# Altium PCB Placa_Alimentacion_9V.PcbDoc
Units mm, origin at the board's own origin, x right, y up, seen from the top; angles counter-clockwise.
Board outline 70 x 70 mm, 2 copper layers (Top Layer, Bottom Layer), stack 1.571 mm thick; 9 components, 3 nets, 48 pads, 0 vias.
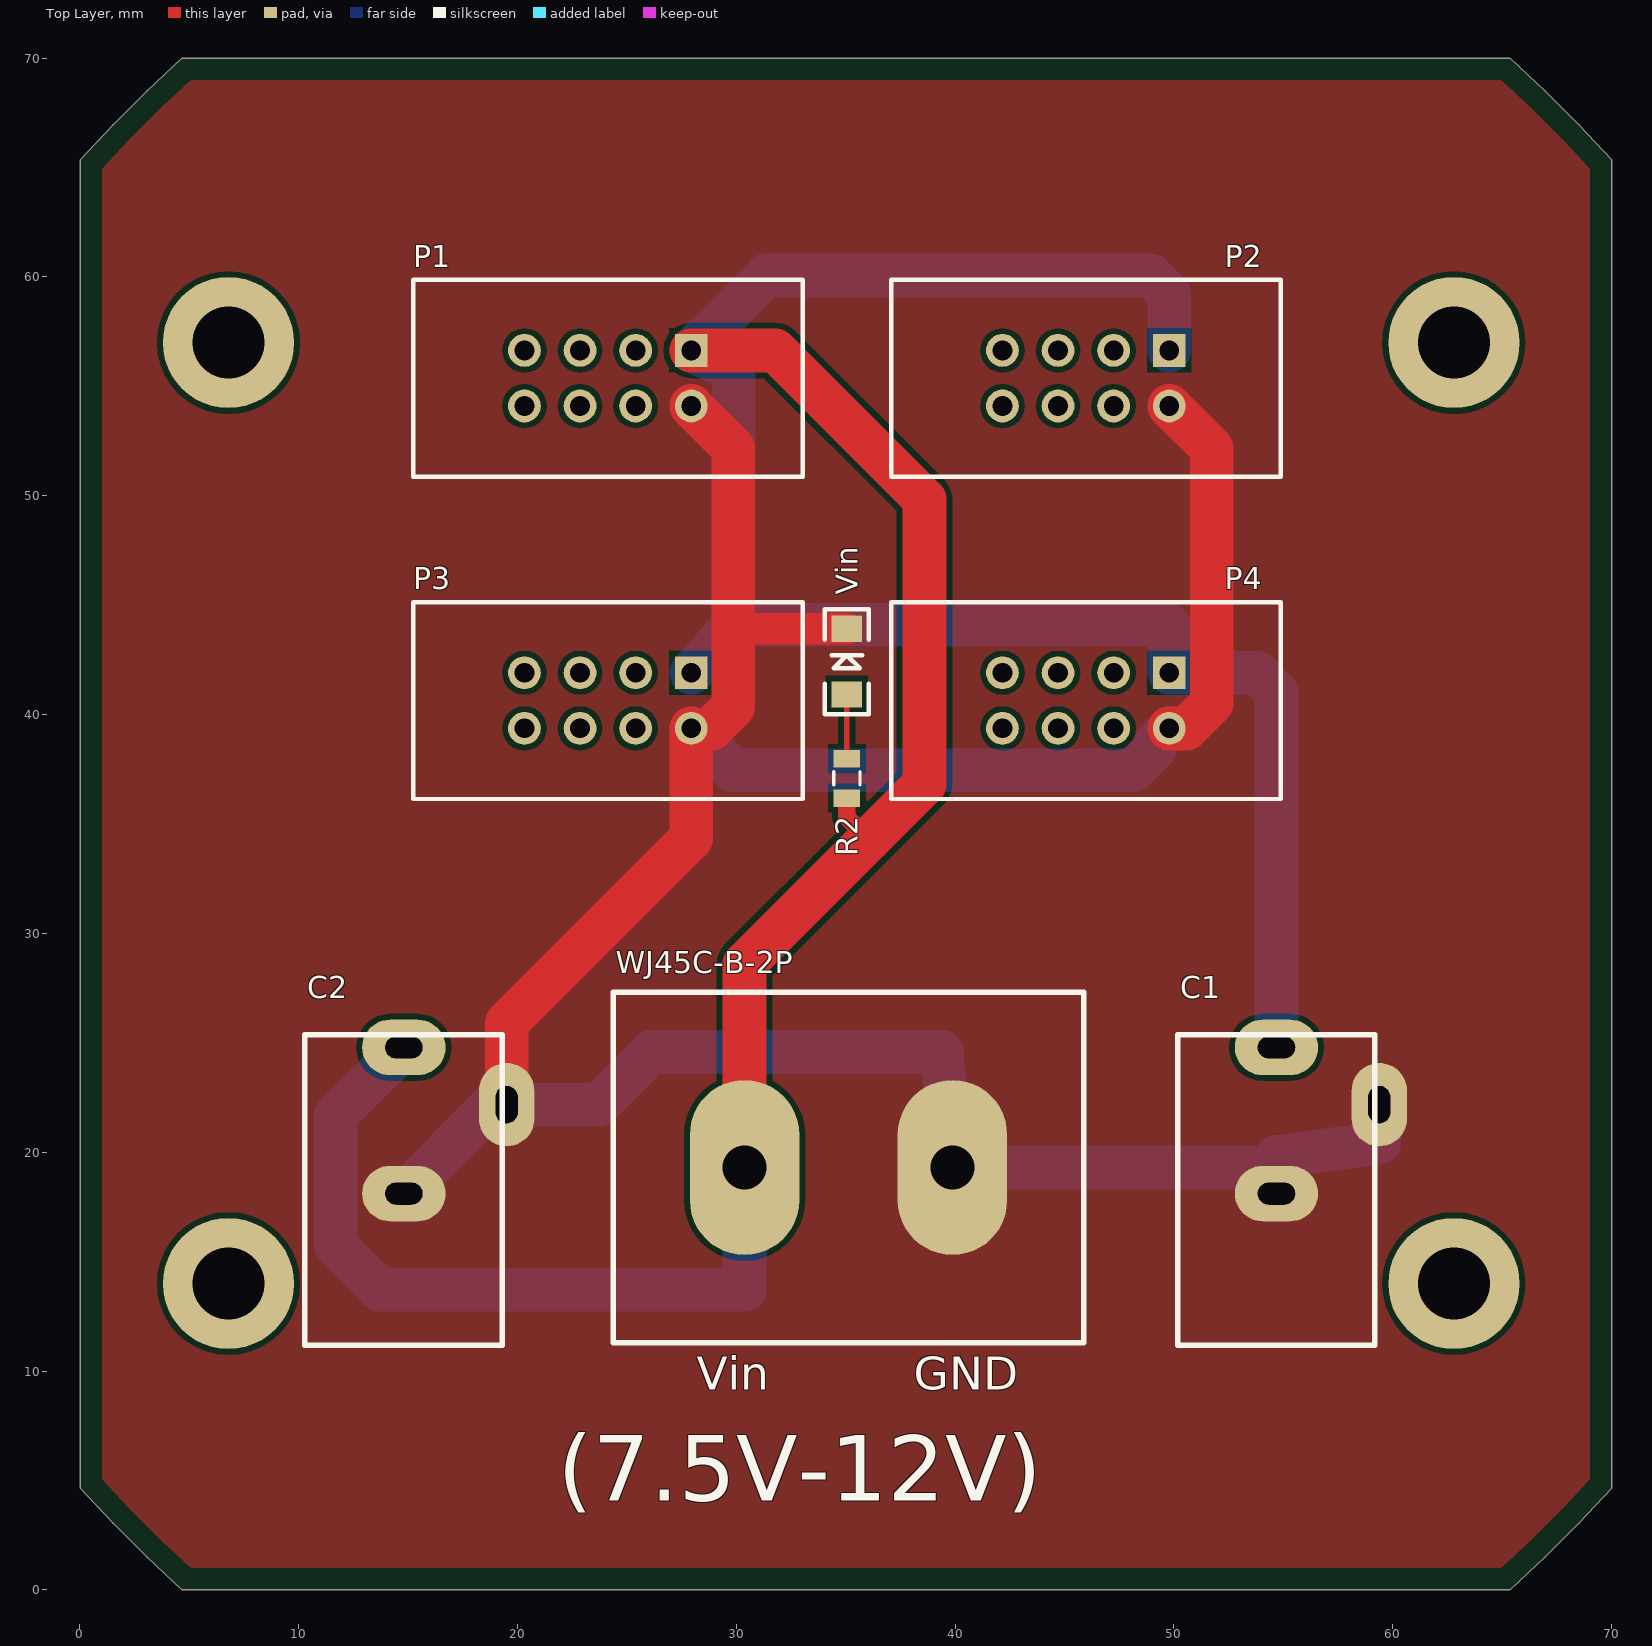
[diagram p0: Top Layer view]
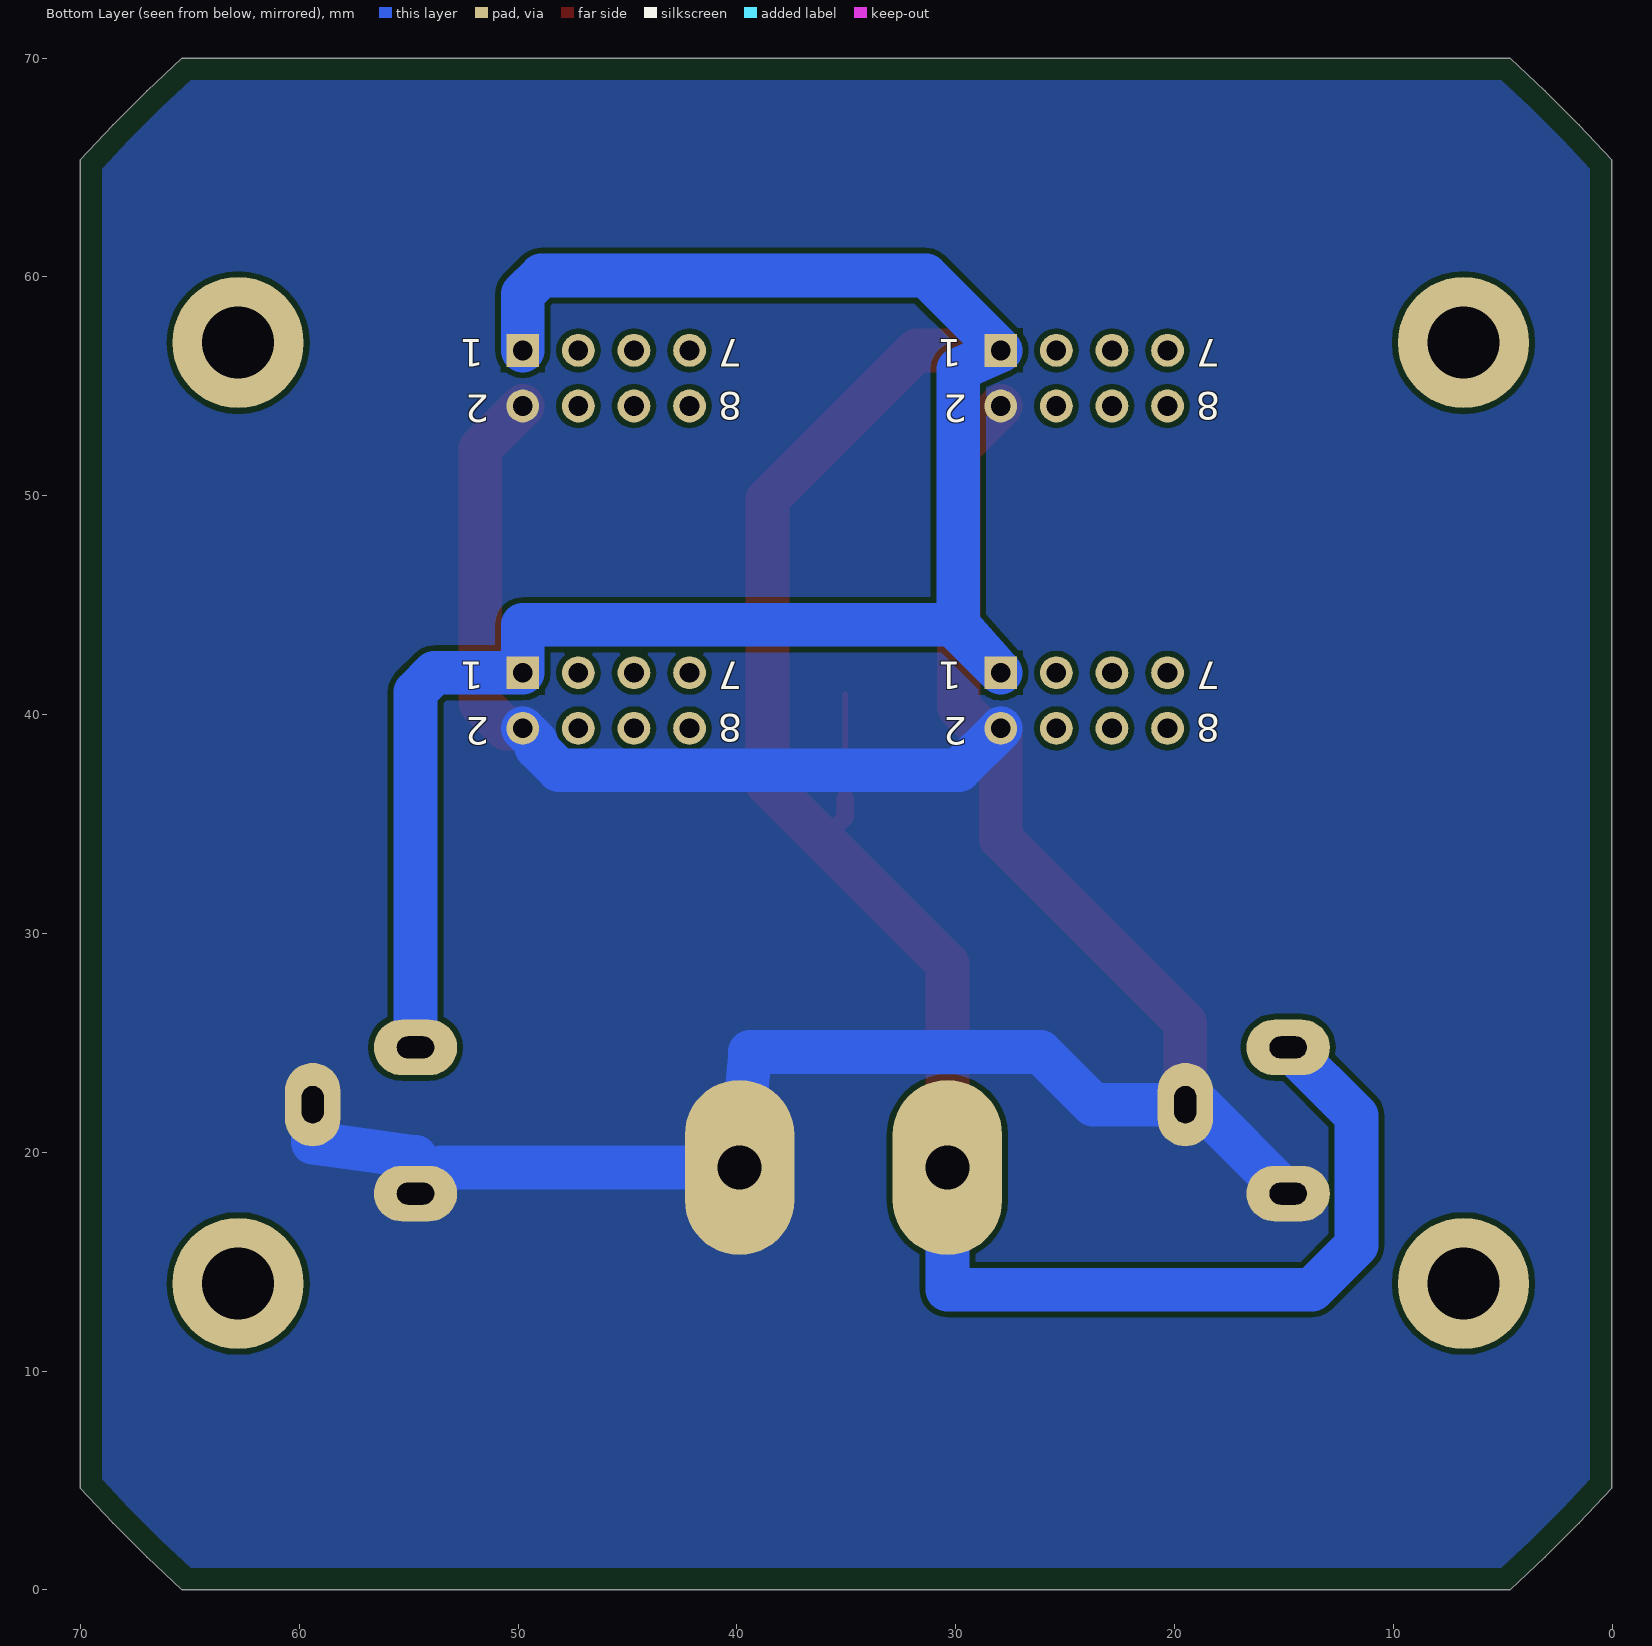
[diagram p1: Bottom Layer view, seen from below]
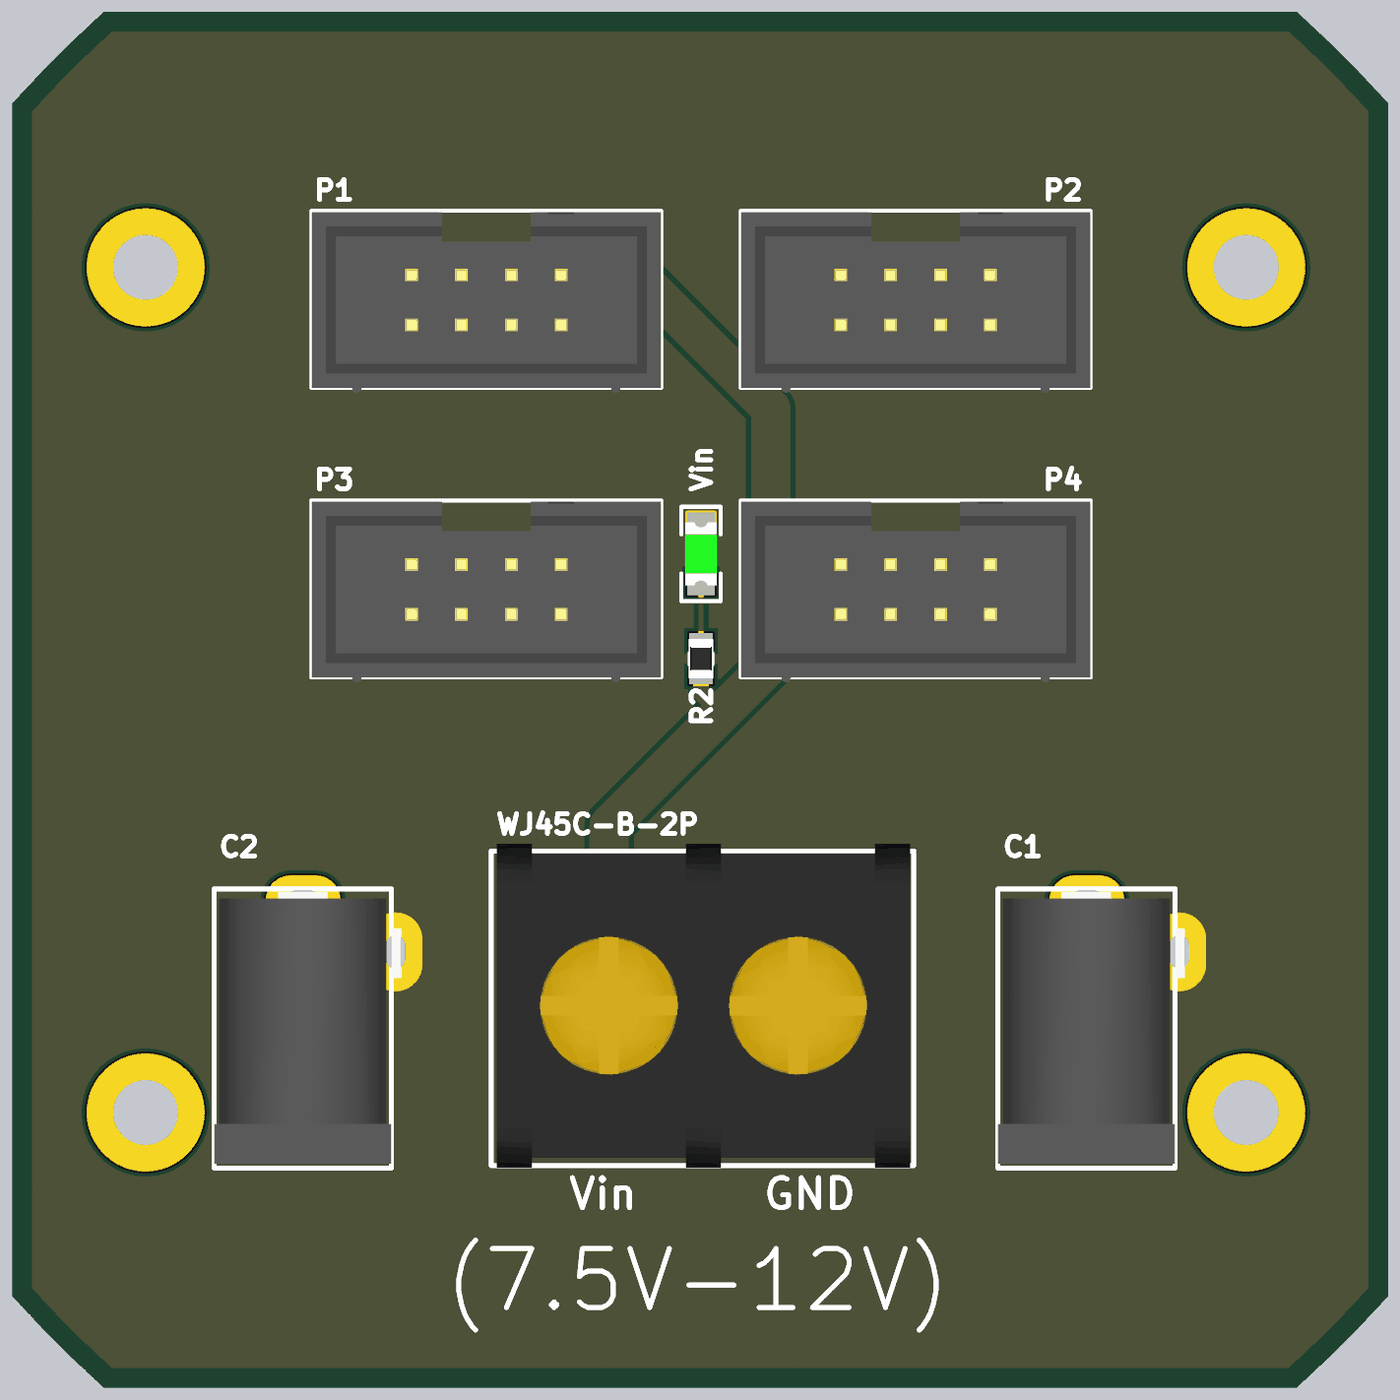
[diagram p2: 3D render of the assembled board from above, using the file's embedded part models]

## Layer stack, top to bottom
Top Solder: solder mask 0.0102, Solder Resist, Dk 3.5
Top Layer: signal copper 0.0356
Dielectric 1: dielectric 1.5, FR-4, Dk 4.8
Bottom Layer: signal copper 0.0356
Bottom Solder: solder mask 0.0102, Solder Resist, Dk 3.5

## Board outline
0.014,4.653 1.515,3.052 3.066,1.501 4.667,0 65.361,0 66.962,1.501 68.513,3.052 70.014,4.653 70.014,65.347 68.513,66.948 66.962,68.499 65.361,70 4.667,70 3.066,68.499 1.515,66.948 0.014,65.347

## Design rules (kind name [scope] priority, off if disabled: settings)
BoardOutlineClearance [All] p1: gap=1 ignorepadtopadclearanceinfootprint=FALSE
Clearance Clearance_2 [InNamedPolygon('GND TOP PLANE')] p1: gap=0.254 ignorepadtopadclearanceinfootprint=FALSE
Clearance Clearance_1 [InNamedPolygon('GND BOTTOM PLANE')] p2: gap=0.254 ignorepadtopadclearanceinfootprint=FALSE
Clearance Clearance_JUMPER [InNet('GND') vs InNet('PGND')] p3: gap=0.05 ignorepadtopadclearanceinfootprint=FALSE
Clearance Clearance_POWER [InNet('24V') vs InNet('PGND')] p4: gap=0.381 ignorepadtopadclearanceinfootprint=FALSE
Clearance [All] p5: gap=0.152 ignorepadtopadclearanceinfootprint=FALSE
HoleSize [All] p1: absolutevalues=TRUE maxlimit=6.3 minlimit=0.3 maxpercent=80.000 minpercent=20.000
PlaneClearance [All] p1: clearance=5.016
PlaneConnect [All] p1: planeconnectstyle=Relief reliefexpansion=0.508 reliefentries=4 reliefconductorwidth=1 reliefairgap=-0.05
PolygonConnect [All] p1: connectstyle=Relief reliefconductorwidth=1 reliefentries=4 polygonreliefangle="90 Angle" airgapwidth=-0.05
RoutingVias RoutingVias_24V [InNet('24V')] p1: holewidth=0.5 width=0.8 viastyle="Through Hole" minholewidth=0.3 minwidth=0.6 maxholewidth=1 maxwidth=1.2
RoutingVias RoutingVias_PGND [InNet('PGND')] p2: holewidth=0.5 width=0.8 viastyle="Through Hole" minholewidth=0.3 minwidth=0.6 maxholewidth=1 maxwidth=1.2
RoutingVias RoutingVias_PGNDC [InNet('PGNDC')] p3: holewidth=0.5 width=0.8 viastyle="Through Hole" minholewidth=0.3 minwidth=0.6 maxholewidth=1 maxwidth=1.2
RoutingVias RoutingVias_MOTOR1 [InNet('MOTOR1')] p4: holewidth=0.5 width=0.8 viastyle="Through Hole" minholewidth=0.3 minwidth=0.6 maxholewidth=1 maxwidth=1.2
RoutingVias RoutingVias_MOTOR2 [InNet('MOTOR2')] p5: holewidth=0.5 width=0.8 viastyle="Through Hole" minholewidth=0.3 minwidth=0.6 maxholewidth=1 maxwidth=1.2
RoutingVias RoutingVias_C17_1 [InNet('NetC17_+')] p6: holewidth=0.5 width=0.8 viastyle="Through Hole" minholewidth=0.3 minwidth=0.6 maxholewidth=1 maxwidth=1.2
RoutingVias [All] p7: holewidth=0.3 width=0.6 viastyle="Through Hole" minholewidth=0.3 minwidth=0.6 maxholewidth=1 maxwidth=1.2
SMDNeckDown [All] p1: percent=120.000
SilkToSilkClearance [All] p1 off: silktosilkclearance=0.127
SolderMaskExpansion [All] p1: expansion=0.102
Width Width_Motor1 [InNet('MOTOR1')] p1: maxlimit=0.889 minlimit=0.7 preferedwidth=0.8
Width Width_Motor2 [InNet('MOTOR2')] p2: maxlimit=0.889 minlimit=0.7 preferedwidth=0.8
Width Width_24V [InNet('24V')] p3: maxlimit=10 minlimit=0.5 preferedwidth=0.8
Width Width_PGND [InNet('PGND')] p4: maxlimit=10 minlimit=0.6 preferedwidth=0.8
Width Width_PGNDC [InNet('PGNDC')] p5: maxlimit=10 minlimit=0.6 preferedwidth=0.8
Width Width_GND [InNet('GND')] p6: maxlimit=10 minlimit=1 preferedwidth=2 checkconnectedcopper=TRUE
Width Width_Vin [InNet('Vin')] p7: maxlimit=5 minlimit=1 preferedwidth=2 checkconnectedcopper=TRUE
Width Width_C17_1 [InNet('NetC17_+')] p8: maxlimit=0.508 minlimit=0.254 preferedwidth=0.381 checkconnectedcopper=TRUE
Width Width_5V [InNet('5V')] p9: maxlimit=0.381 minlimit=0.254 preferedwidth=0.381 checkconnectedcopper=TRUE
Width [All] p10: maxlimit=10 minlimit=0.254 preferedwidth=0.254
26 further rules are at their usual default settings.

## Components (designator, comment, footprint, x,y, rotation, side; value= is the part's Value field where it differs from the comment)
C1 "DC-005C-A" DC-005C-A 59.182,11.176 r90 top
C2 "DC-005C-A" DC-005C-A 19.304,11.176 r90 top
P1 "IDC2X4" IDC2X4 24.13,55.372 r180 top
P2 "IDC2X4" IDC2X4 45.974,55.372 r180 top
P3 "IDC2X4" IDC2X4 24.13,40.64 r180 top
P4 "IDC2X4" IDC2X4 45.974,40.64 r180 top
R2 "1K" 0805 35.052,37.084 r270 top
Vin "1206 LED" LED-1206 35.052,42.418 r90 top
WJ45C-B-2P "WJ45C-B-2P" WJ45C-B-2P 39.878,19.304 r180 top

## Footprints (in the part's own frame and the unit in brackets; to place one, negate y for a bottom-side part, rotate by r counter-clockwise, add the part's x,y. Pads: shape width x height; smd on the part's side, far side on the other; paste and mask are expansions set on the pad)
0805 [mil]
  rect 31.5x47.24 smd: 1(-35.43,0) 2(35.43,0)
  silkscreen extent -12,-24 12,24, body extent -39,-25 39,25, height 20
DC-005C-A [mil] "DC-005C-A C84007"
  oval 100x150 hole 39.37 slot 66.93 at 90 deg: 1(536,177) 2(273,177)
  oval 150x100 hole 39.37 slot 66.93 at 0 deg: 3(433,-8)
  silkscreen extent 0,0 559,355, body extent 9,-19 553,355, height 433
IDC2X4 [mm] "IDC Connector 2x4"
  rect 1.5x1.5 hole 0.9: 1(-3.81,-1.27)
  round 1.5 hole 0.9: 2(-3.81,1.27) 3(-1.27,-1.27) 4(-1.27,1.27) 5(1.27,-1.27) 6(1.27,1.27) 7(3.81,-1.27) 8(3.81,1.27)
  silkscreen extent -8.9,-4.5 8.9,4.5, body extent -8.89,-4.45 8.89,4.76, height 9.01
LED-1206 [mm]
  rect 1.2x1.4 smd: A(-1.5,0) C(1.5,0)
  silkscreen extent -2.4,-1 2.4,1, body extent -1.6,-0.8 1.6,0.8, height 1.11
WJ45C-B-2P [mm]
  oval 5x8 hole 2: 1(0,0) 2(9.5,0)
  silkscreen extent -6,-8 15.5,8, body extent -5.83,-8.38 15.22,8.12, height 18.5

## Part data
P1 P2 P3 P4: "Header, 4-Pin, Dual row", LatestRevisionDate=17-Jul-2002, LatestRevisionNote="Re-released for DXP Platform.", Publisher="Altium Limited"
R2: library part RESISTOR0805-RES
Vin: library part LED1206

## Free pads (board coordinates)
  round 6 hole 3.3: 7(6.794,14) 9(6.794,57) 10(62.794,14) 10(62.794,57)

## Nets (pads, with @x,y where several pads share a name; then routed paths per layer and width w, separated by ;. In a path a pad name is that pad's centre, name@x,y a point inside that pad or via, vN(x,y) a via of type N, cw(c..) or ccw(c..) an arc to the next point about the centre after c; other vN are vias at no path point)
GND: C1.2 C1.3 C2.2 C2.3 P1.2 P2.2 P3.2 P4.2 Vin.C WJ45C-B-2P.1 | length 139.1
  Top Layer w1.44: P3.2 28.876,39.37 ; 29.861,43.918 Vin.C
  Top Layer w2: C2.3 19.507,25.902 27.94,34.335 P3.2 ; P1.2 29.861,52.181 29.861,43.918 29.861,40.355 28.876,39.37 ; P4.2 50.568,39.37 51.73,40.533 51.73,52.156 P2.2
  Bottom Layer w2: C2.2 18.872,22.174 C2.3 23.72,22.174 26.127,24.581 39.395,24.581 WJ45C-B-2P.1 53.492,19.304 C1.2 54.686,19.781 59.385,20.441 C1.3 ; P3.2 29.851,37.459 48.124,37.459 49.165,38.501 49.165,38.751 P4.2
NetR2_1: R2.1 Vin.A | length 2.9
  Top Layer w0.254: R2.1 Vin.A
Vin: C1.1 C2.1 P1.1 P2.1 P3.1 P4.1 R2.2 WJ45C-B-2P.2 | length 174.7
  Top Layer w0.8: R2.2 35.052,35.306 36.068,34.29
  Top Layer w2: P1.1 31.786,56.642 38.599,49.829 38.599,36.821 36.068,34.29 30.378,28.6 WJ45C-B-2P.2
  Bottom Layer w2: C2.1 11.684,21.666 11.684,15.748 13.716,13.716 30.378,13.716 WJ45C-B-2P.2 ; P2.1 49.784,59.218 48.936,60.065 31.363,60.065 P1.1 29.886,55.773 29.886,44.105 ; C1.1 54.686,41.037 53.813,41.91 P4.1 49.784,44.105 29.886,44.105 ; 29.886,44.105 29.886,43.856 P3.1 29.886,44.105
pads on no net: P1.3 P1.4 P1.5 P1.6 P1.7 P1.8 P2.3 P2.4 P2.5 P2.6 P2.7 P2.8 P3.3 P3.4 P3.5 P3.6 P3.7 P3.8 P4.3 P4.4 P4.5 P4.6 P4.7 P4.8

## Polygon pours and split planes (outlines as drawn)
GND on Bottom Layer "GND BOTTOM PLANE" (solid, pour order 0): -5.588,76.962 -5.08,76.454 87.122,76.454 87.122,1.524 76.708,-8.89 75.946,-8.128 -19.812,-8.128
GND on Top Layer "GND TOP PLANE" (solid, pour order 2): -8.382,76.454 -6.858,74.93 79.756,74.93 79.756,-10.668 79.502,-10.414 -15.494,-10.414

## Silkscreen, mask and mechanical layers (free items; w line width, h text height)
Top Overlay:
  text "Vin" at 28.194,9.144 h1.52
  text "GND" at 38.1,9.144 h1.52
  text "(7.5V-12V)" at 21.844,4.064 h3
Mechanical 2:
  the board outline again, w0.2

## Text inside footprints (layer, text, board x,y; h text height)
P1: Bottom Overlay "1" at 29.718,57.15 h1.27 r180; Bottom Overlay "2" at 29.464,54.61 h1.27 r180; Bottom Overlay "7" at 17.907,57.15 h1.27 r180; Bottom Overlay "8" at 17.907,54.737 h1.27 r180
P2: Bottom Overlay "1" at 51.562,57.15 h1.27 r180; Bottom Overlay "2" at 51.308,54.61 h1.27 r180; Bottom Overlay "7" at 39.751,57.15 h1.27 r180; Bottom Overlay "8" at 39.751,54.737 h1.27 r180
P3: Bottom Overlay "1" at 29.718,42.418 h1.27 r180; Bottom Overlay "2" at 29.464,39.878 h1.27 r180; Bottom Overlay "7" at 17.907,42.418 h1.27 r180; Bottom Overlay "8" at 17.907,40.005 h1.27 r180
P4: Bottom Overlay "1" at 51.562,42.418 h1.27 r180; Bottom Overlay "2" at 51.308,39.878 h1.27 r180; Bottom Overlay "7" at 39.751,42.418 h1.27 r180; Bottom Overlay "8" at 39.751,40.005 h1.27 r180